# EAGLE board umodular_midi4_rev01 (EAGLE 7.2.0)
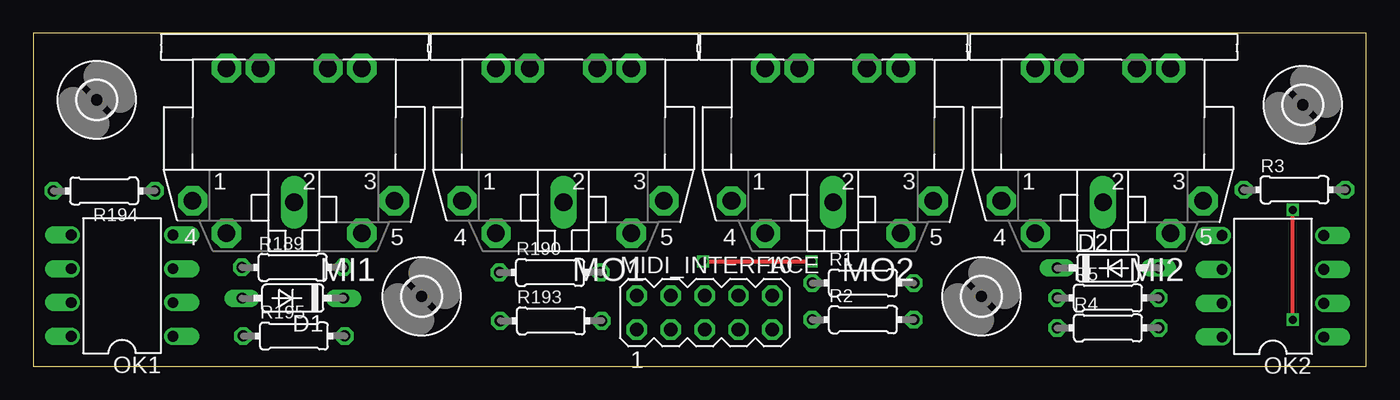
[diagram p0: board, top side]
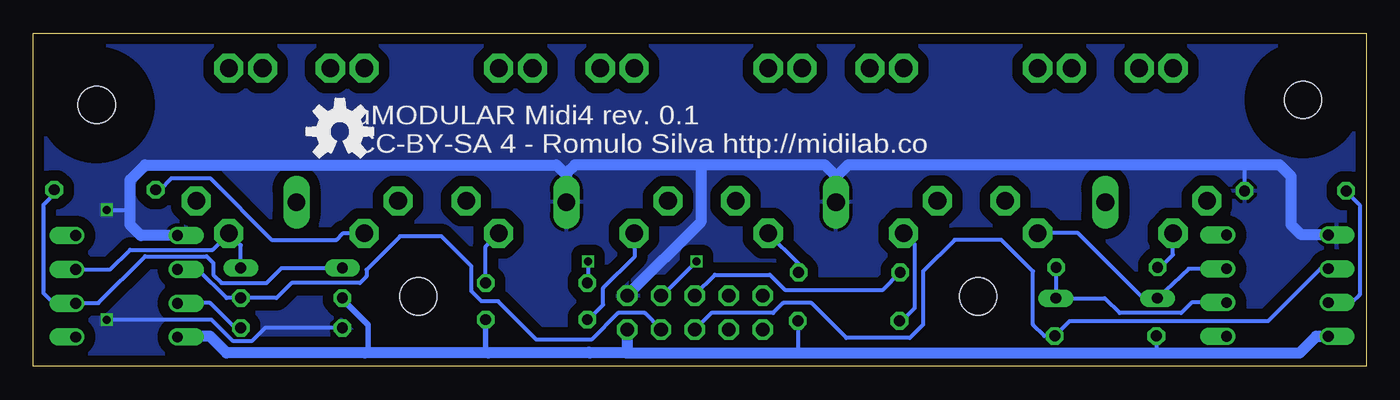
[diagram p1: board, bottom side, seen from below]

Size 100 x 25 mm. Coordinates in mm from the lower left corner, seen from the top.
Outline: 0,0 100,0 100,25 0,25 0,0
Copper layers (1*16): Top 0.035mm / dielectric 1.5mm / Bottom 0.035mm
Design rules "SeeedStudio_2layer_DRU_no_angle_20140221": minimum track width 6mil, minimum drill 12mil, track to track 6mil, track to pad 6mil, pad to pad 6mil, via to via 6mil, smd to smd 0mil, copper to edge 10mil, drill to drill 10mil, minimum pad ring 10mil, minimum via ring 6mil, stop-mask expansion 2mil, vias tented up to drill 100mil, thermal gap 10mil
Net classes: 0 default: width 0.305 mm

## Footprints (pad centres in the part's own frame; a part is rotated, then mirrored left to right if it is on the bottom)
DO35-7 = drill 0.813 long: A 3.81,0; C -3.81,0
CP-2350 = drill 1.321 pad 2.184 octagon: 1 7.62,12.58; 3 -7.52,12.58; 4 5.08,15.02; 5 -5.08,15.02; PE -2.54,2.62; PE1 -5.08,2.62; PE2 5.08,2.62; PE@ 2.54,2.62 | drill 1.321 long: 2 0,12.68
MA05-2 = drill 1.016 octagon: 1 -5.08,-1.27; 2 -5.08,1.27; 3 -2.54,-1.27; 4 -2.54,1.27; 5 0,-1.27; 6 0,1.27; 7 2.54,-1.27; 8 2.54,1.27; 9 5.08,-1.27; 10 5.08,1.27
DIL08 = drill 0.813 offset: 1 -3.81,-3.81; 2 -1.27,-3.81; 3 1.27,-3.81; 4 3.81,-3.81; 5 3.81,3.81; 6 1.27,3.81; 7 -1.27,3.81; 8 -3.81,3.81
0204/7@1 = drill 0.813 octagon: 1 -3.81,0; 2 3.81,0
2,8 = hole 2.8: 0,0

## Placement (x,y rotation side)
D1  [DO35-7]  19.47,5.11 180 top
D2  [DO35-7]  80.62,7.38 0 top
MI1  IN_1  [CP-2350]  19.57,25 180 top
MI2  IN_2  [CP-2350]  80.25,25 180 top
MIDI_INTERFACE  INPUT  [MA05-2]  50.37,4.03 0 top
MO1  OUT_1  [CP-2350]  39.78,25 180 top
MO2  OUT_2  [CP-2350]  60,25 180 top
OK1  6N138  [DIL08]  6.66,6.05 90 top
OK2  6N138  [DIL08]  93,6 90 top
R1  220  [0204/7@1]  62.25,6.25 0 top
R2  220  [0204/7@1]  62.25,3.5 0 top
R3  220  [0204/7@1]  94.62,13.25 0 top
R4  4.7k  [0204/7@1]  80.62,2.88 0 top
R5  1k  [0204/7@1]  80.62,5.12 0 top
R189  220  [0204/7@1]  19.45,7.42 0 top
R190  220  [0204/7@1]  38.77,7.04 0 top
R193  220  [0204/7@1]  38.83,3.41 0 top
R194  4.7k  [0204/7@1]  5.32,13.16 180 top
R195  1k  [0204/7@1]  19.55,2.27 0 top
U$1  [2,8]  29.12,5.25 0 top
U$2  [2,8]  4.75,20 0 top
U$3  [2,8]  95.25,19.62 0 top
U$4  [2,8]  71.12,5.25 0 top
U$5  [OSHW-LOGO-M]  77,17.62 0 top

## Library data of the parts
D1 D2 = diode
MI1 MI2 MO1 MO2 = adafruit
MIDI_INTERFACE = con-lstb; OC_FARNELL: unknown; OC_NEWARK: unknown
OK1 OK2 = optocoupler; MF: VISHAY/TELEFUNKEN; MPN: 6N138; OC_FARNELL: 9860150; OC_NEWARK: 35K5294
R1-R5 R189 R190 R193-R195 = rcl
U$1-U$4 = holes
U$5 = SparkFun-Aesthetics2

## Nets
GND: MIDI_INTERFACE.10 MO1.2 MO2.2 OK1.5 OK2.5 R4.1 R194.1
MIDI_IN1: MIDI_INTERFACE.5 OK1.6 R195.2
MIDI_IN2: MIDI_INTERFACE.7 OK2.6 R5.2
MIDI_OUT1: MIDI_INTERFACE.6 R190.1
MIDI_OUT2: MIDI_INTERFACE.8 R1.1
N$1: MO2.4 R2.1
N$2: MO2.5 R1.2
N$3: MI2.4 R3.1
N$4: D2.C OK2.2 R3.2
N$5: D2.A MI2.5 OK2.3
N$6: OK2.7 R4.2
N$330: MI1.4 R189.1
N$331: MO1.4 R193.1
N$332: MO1.5 R190.2
N$333: D1.C OK1.2 R189.2
N$336: D1.A MI1.5 OK1.3
N$337: OK1.7 R194.2
VCC: MIDI_INTERFACE.9 OK1.8 OK2.8 R2.2 R5.1 R193.2 R195.1

## Tracks (layer width: path | path; a pad name or v marks a point on that pad's centre or on a via)
GND  (via drill 0.6)
  Top 0.305: v94.5,3.5 v94.5,11.75
  Bottom 0.305: R4.1 82.62,2.88 83.62,1.88 85,1.88 86.62,3.5 v94.5,3.5 | v94.5,11.75 93,11.75 92.75,11.38 | R194.1 9.12,15 9,15.12
  Bottom 0.813: 39.88,14.12 39.88,14.38 40.62,15.12 50.12,15.12 | 39.88,14.12 39.88,12.41 MO1.2 | OK1.5 4.86,9.86 5.62,10.62 5.62,14.25 6.5,15.12 9,15.12 38.88,15.12 39.88,14.12 | 50.12,15.12 59.38,15.12 60,14.5 60,14.38 | 60,14.38 MO2.2 | OK2.5 91.94,9.81 92.75,10.62 92.75,11.38 92.75,14 91.62,15.12 60.75,15.12 60,14.38 | MIDI_INTERFACE.10 49.88,10.88 49.88,14.88 50.12,15.12
  pour Bottom (isolate 0.813): 0,25 100.25,25.25 100.25,-0.12 0,-0.38
MIDI_IN1
  Bottom 0.305: OK1.6 3.43,7.32 7.38,3.38 22.26,3.38 R195.2 24.14,2.27 25,3.12 25,7.12 27.38,9.5 30.88,9.5 33.25,7.12 33.25,3.12 34.25,2.12 39,2.12 41.62,4.75 43.75,4.75 44.5,4 49.12,4 MIDI_INTERFACE.5
MIDI_IN2
  Bottom 0.305: MIDI_INTERFACE.7 52.91,2.78 54.12,4 56.12,4 58.12,2 62.25,2 65.12,4.88 66.38,4.88 67.12,5.62 67.12,7.5 69.38,9.75 72.5,9.75 75,7.25 75,6.75 75.5,6.25 80.62,6.25 81.75,5.12 R5.2 85.5,5.12 87.62,7.25 89.17,7.25 OK2.6
MIDI_OUT1
  Bottom 0.305: MIDI_INTERFACE.6 50.37,5.38 48.88,6.88 44.75,6.88 43.62,5.75 36.26,5.75 R190.1
MIDI_OUT2  (via drill 0.6)
  Top 0.305: v50.25,7.88 v58.38,7.88
  Bottom 0.305: MIDI_INTERFACE.8 52.83,5.3 v50.25,7.88 | v58.38,7.88 58.38,6.32 R1.1
N$1
  Bottom 0.305: R2.1 58.38,3.5 57.25,4.62 57.25,5.88 54.88,8.25 54.88,9.94 MO2.4
N$2
  Bottom 0.305: R1.2 66.06,9 MO2.5
N$3
  Bottom 0.305: R3.1 90.5,13.25 89.62,14.12 86.75,14.12 82.12,9.5 77.25,9.5 76.75,10 75.19,10 MI2.4
N$4
  Bottom 0.305: 96.83,4.75 98.5,4.75 99.25,5.5 99.25,12.12 98.44,12.94 R3.2 | 96.83,4.75 OK2.2 | 96.83,4.75 95.12,4.75 91.62,8.25 87,8.25 86.5,7.75 86.5,6.88 85.88,6.25 82.5,6.25 81.38,7.38 D2.C
N$5
  Bottom 0.305: OK2.3 94.23,7.27 92.75,8.75 86.56,8.75 MI2.5 84.44,9.09 D2.A
N$6
  Bottom 0.305: R4.2 84.88,2.88 86.75,4.75 89.17,4.75 OK2.7
N$330
  Bottom 0.305: R189.1 15.45,7.42 14.5,8.38 MI1.4
N$331
  Bottom 0.305: R193.1 34.84,3.41 33.88,4.38 33.88,9.15 MO1.4
N$332
  Bottom 0.305: R190.2 42.59,7.71 MO1.5
N$333
  Bottom 0.305: R189.2 23.27,5.5 D1.C 19.61,5.11 18.5,4 13.88,4 13.1,4.78 OK1.2
N$336
  Bottom 0.305: OK1.3 13.32,7.32 D1.A 16.73,5.11 21.62,10 24.64,10 MI1.5
N$337
  Bottom 0.305: R194.2 1.5,13.13 0.5,12.12 0.5,5.38 1.12,4.75 2.82,4.75 OK1.7
VCC
  Bottom 0.305: R193.2 42.64,1.14 42.5,1 | R195.1 15.74,1.13 15.88,1
  Bottom 0.406: R5.1 76.81,5.07 74.88,3.12 74.88,1.25 75.12,1 | R2.2 66.06,1.19 65.88,1
  Bottom 0.813: 58.25,1 55.5,1 55.45,1.05 MIDI_INTERFACE.9 55.45,1.07 55.38,1 42.5,1 15.88,1 5,1 3.75,2.25 3.48,2.25 OK1.8 | 58.25,1 65.88,1 75.12,1 85.5,1 86.75,2.25 89,2.25 OK2.8 | 58.31,1.06 58.25,1

## Text on the board
bNames: uMODULAR Midi4 rev. 0.1 / CC-BY-SA 4 - Romulo Silva http://midilab.co